# Altium PCB A车主控四层板V2.1.PcbDoc
Units mil, origin at the board's own origin, x right, y up, seen from the top; angles counter-clockwise.
Board outline 3937.01 x 2230.01 mil, 4 copper layers (Top Layer, GND, POWER, Bottom Layer); 112 components, 149 nets, 493 pads, 161 vias.
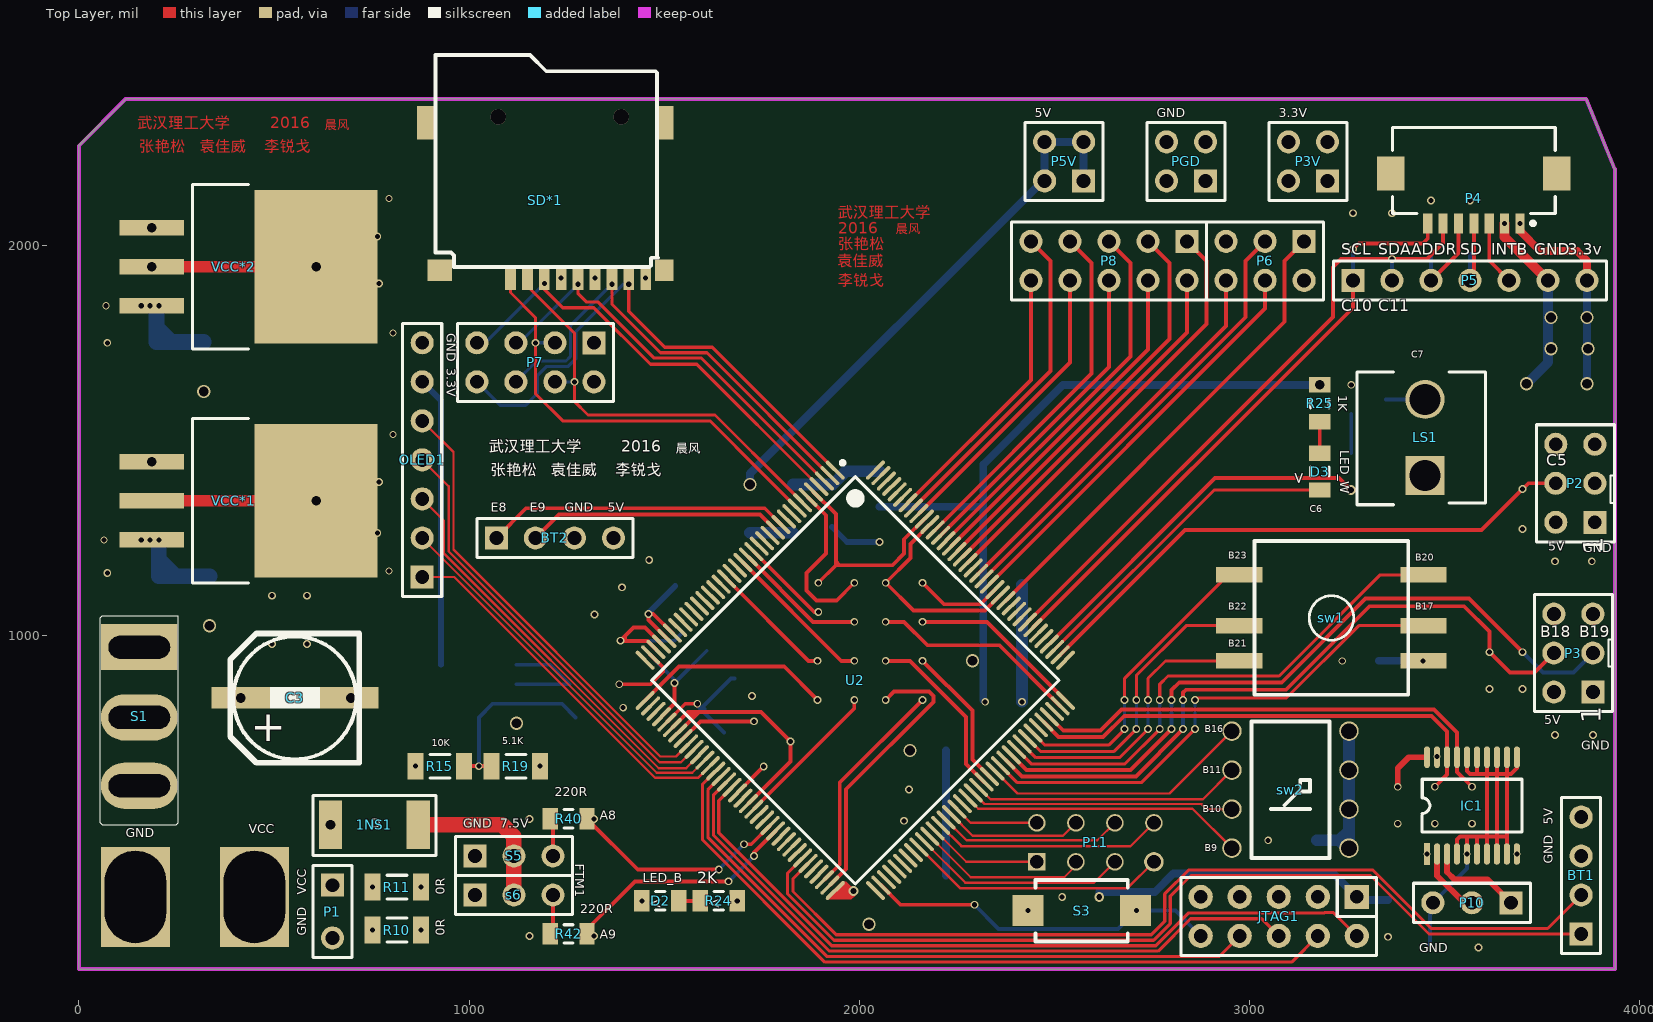
[diagram p0: Top Layer view]
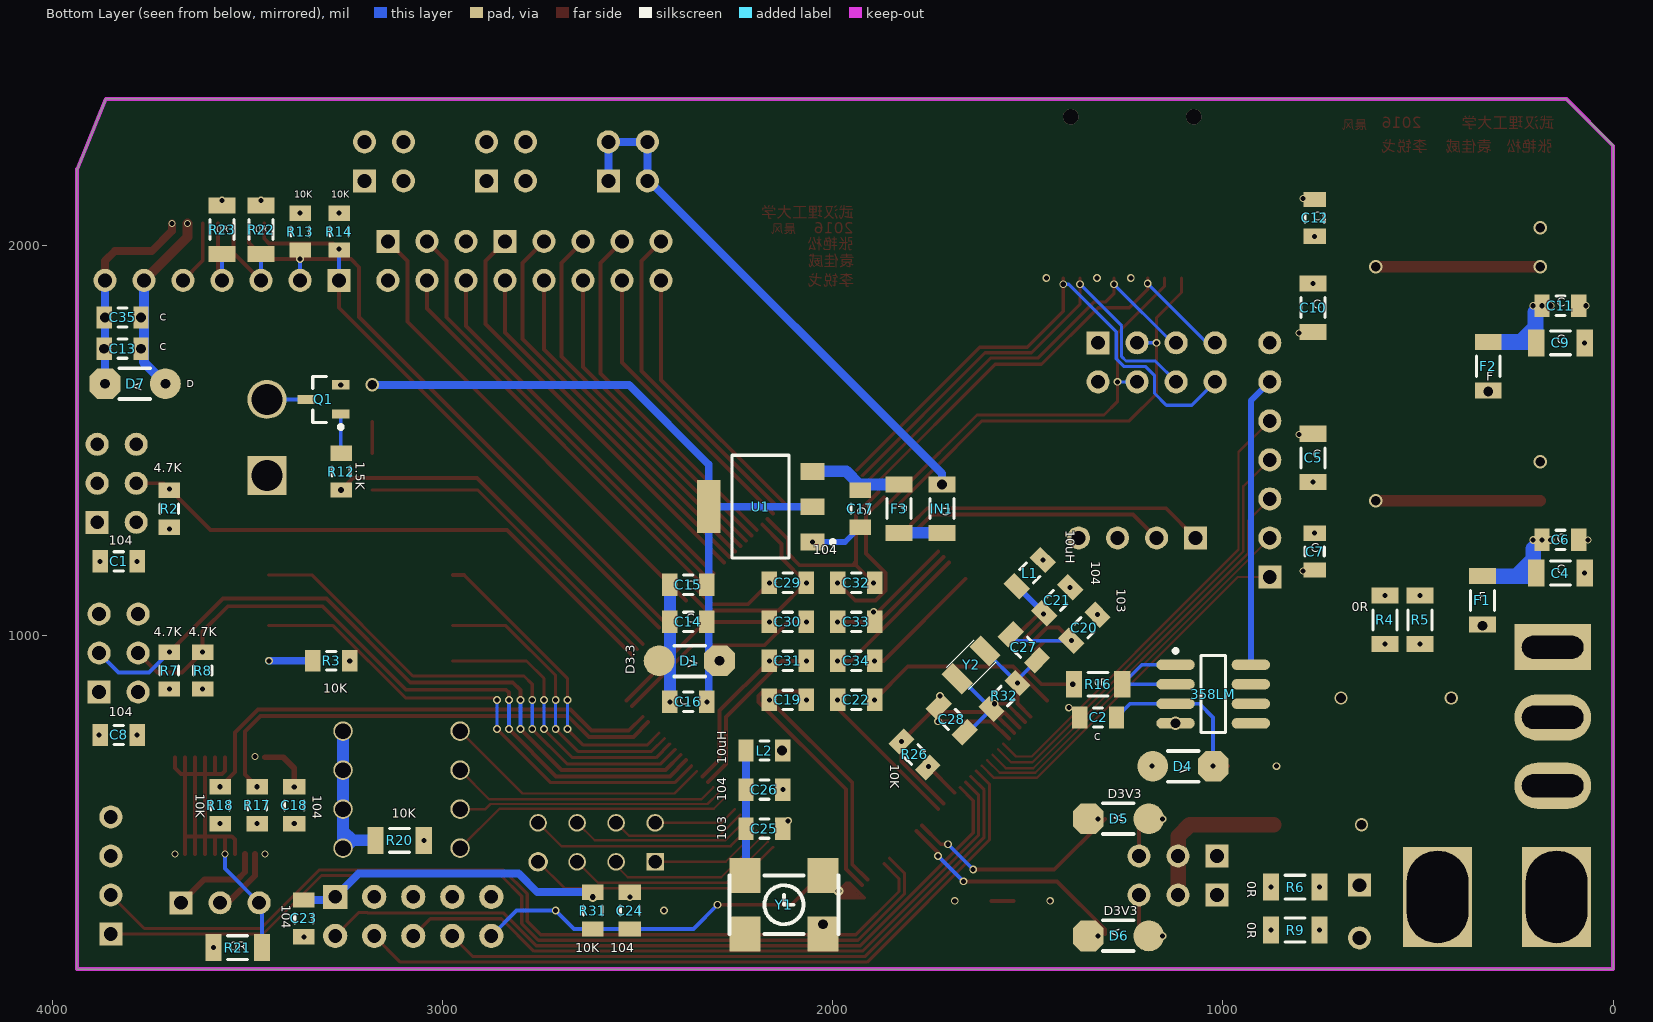
[diagram p1: Bottom Layer view, seen from below]
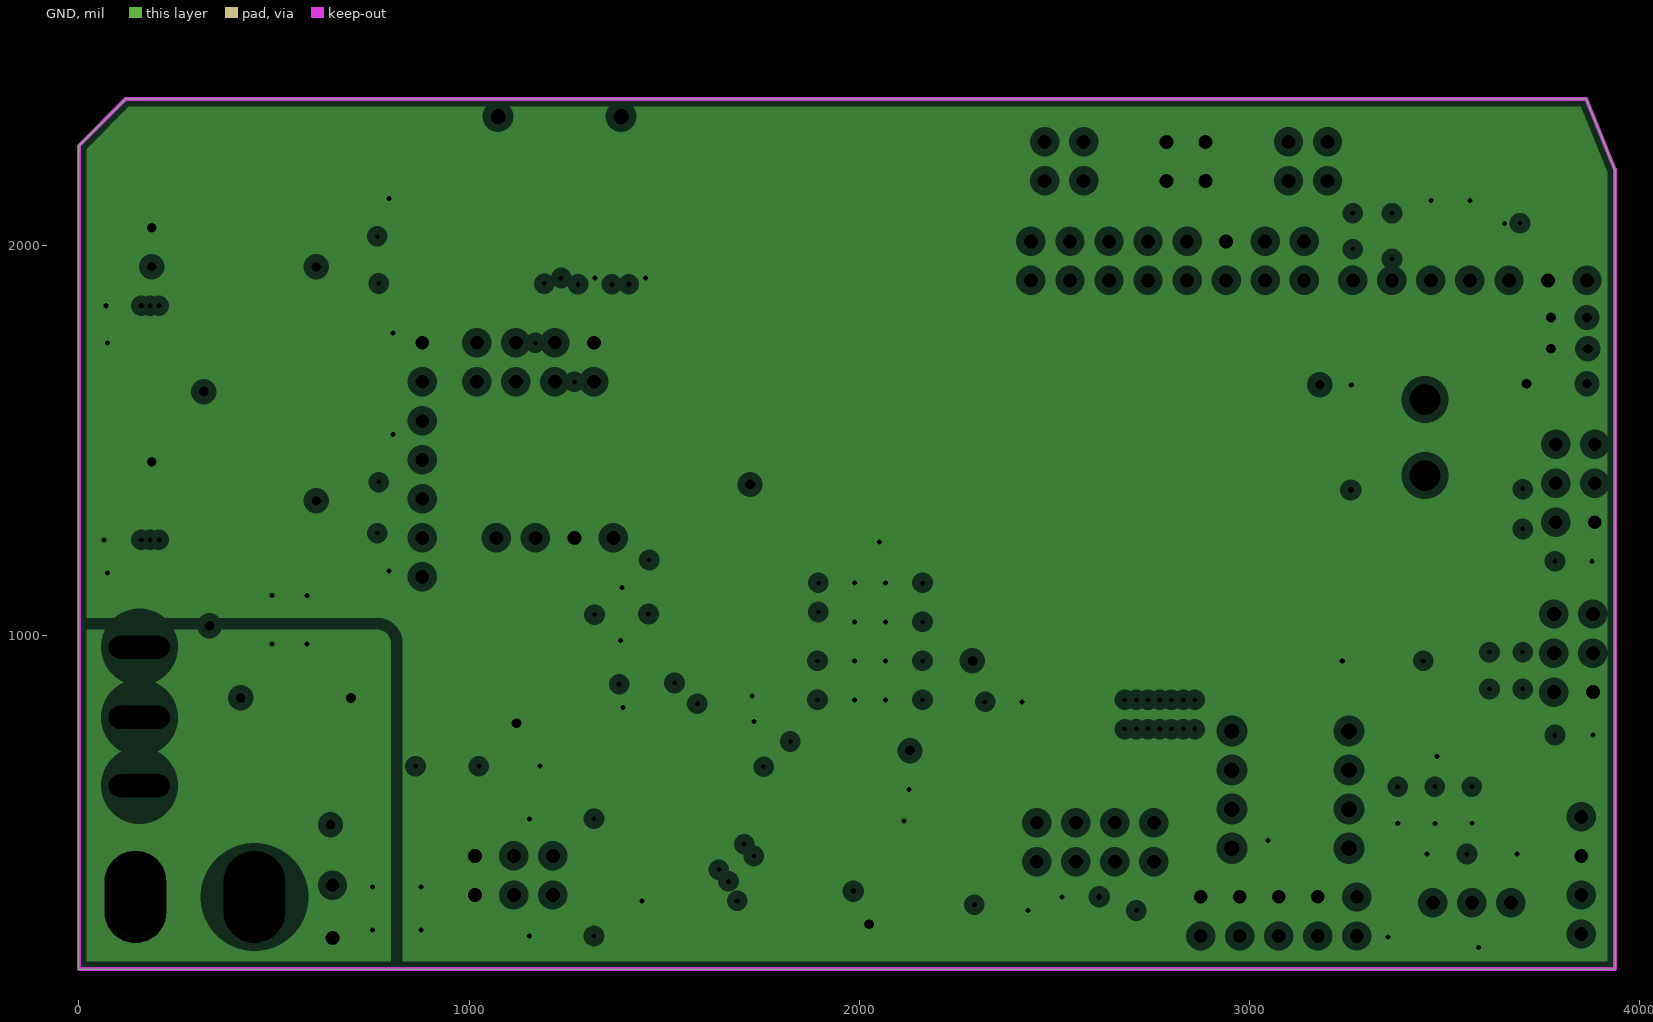
[diagram p2: GND, clearances drawn from the general rule]
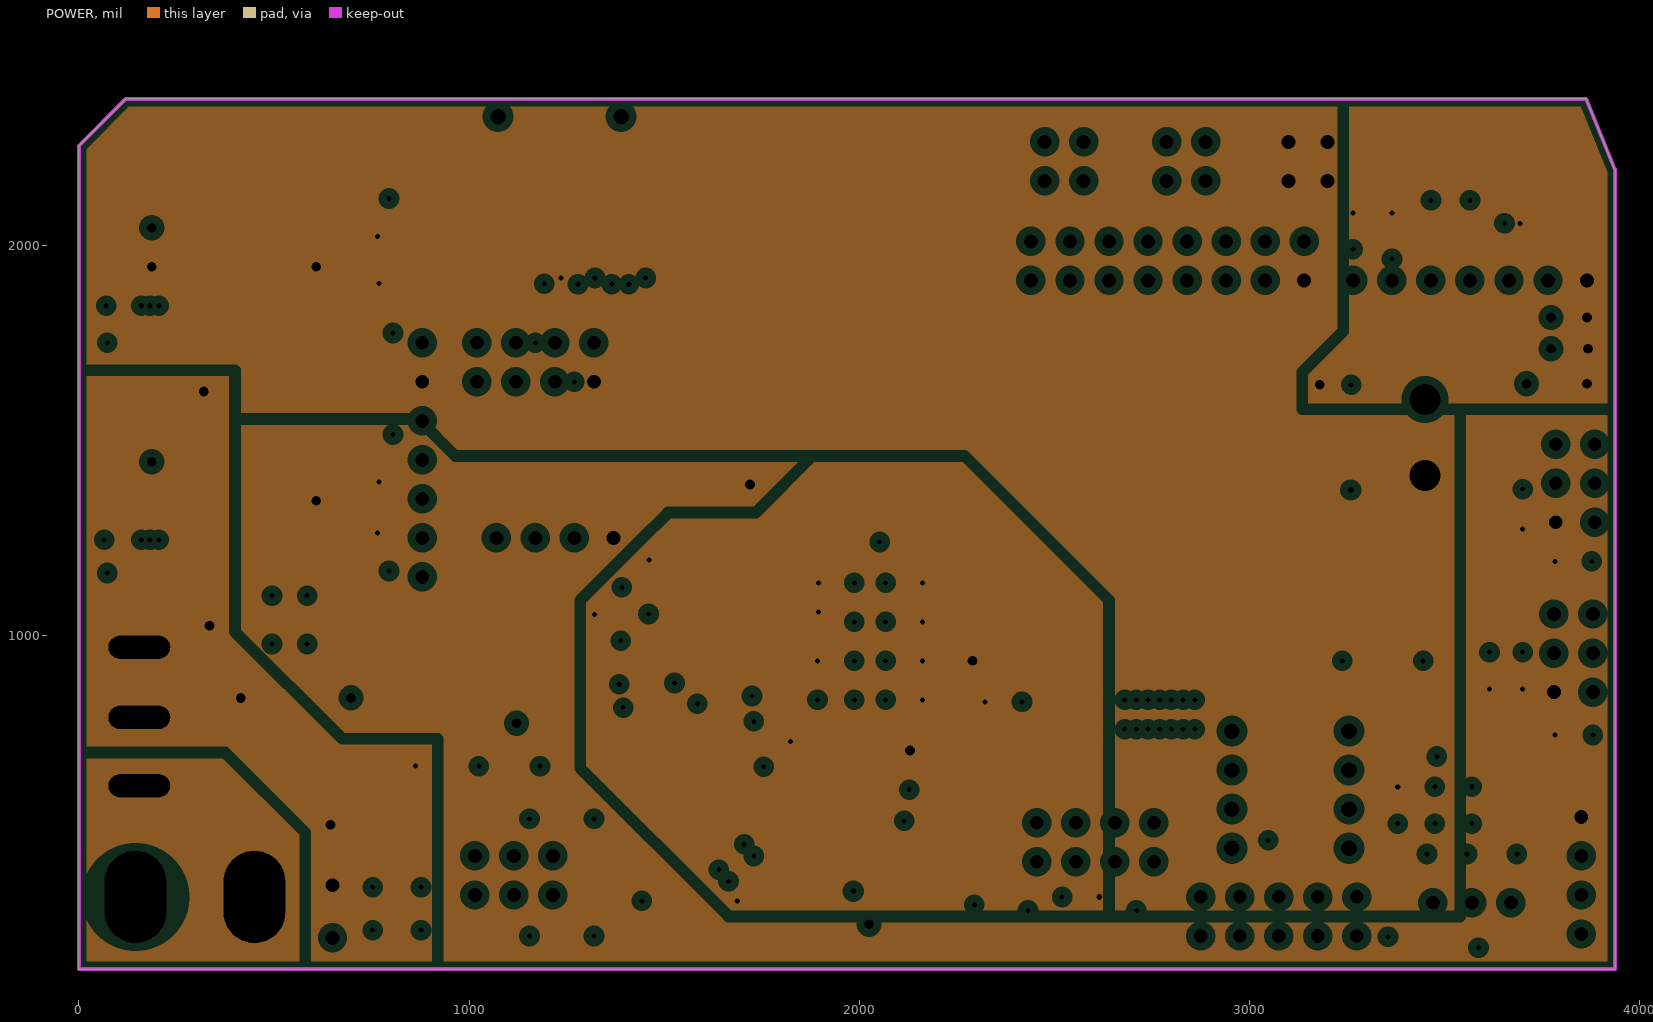
[diagram p3: POWER, clearances drawn from the general rule]

## Layer stack, top to bottom
Top Layer: signal copper 1.4
Dielectric: core 12.6, FR-4, Dk 4.8
GND: plane copper 1.4, net GND
Dielectric: prepreg 12.6, FR-4, Dk 4.8
POWER: plane copper 1.4, net VBAT
Dielectric: core 12.6, FR-4, Dk 4.8
Bottom Layer: signal copper 1.4

## Board outline
0,144.99 0,2255 120,2375 3862.58,2375 3936.07,2194.62 3937.01,2195 3937.01,145.01

## Design rules (kind name [scope] priority, off if disabled: settings)
Clearance [All] p1: gap=6
PlaneClearance [All] p1: clearance=20
PlaneConnect [All] p1: planeconnectstyle=Relief reliefexpansion=20 reliefentries=4 reliefconductorwidth=10 reliefairgap=10
PolygonConnect [All] p1: connectstyle=Relief reliefconductorwidth=10 reliefentries=4 polygonreliefangle="90 Angle" airgapwidth=10
RoutingVias [All] p1: holewidth=28 width=50 viastyle="Through Hole" minholewidth=28 minwidth=50 maxholewidth=28 maxwidth=50
SolderMaskExpansion [All] p1: expansion=4
Width [All] p1: maxlimit=50 minlimit=6 preferedwidth=10 minimp=50.000000 maximp=50.000000 favimp=50.000000
26 further rules are at their usual default settings.

## Components (designator, comment, footprint, x,y, rotation, side; value= is the part's Value field where it differs from the comment)
1NS1 "SK34" SK54 775,515 r0 top
358LM "LM358" SO8_M 1025,850 r180 bottom
BT1 "Header 4" HDR1X4 3850,235 r90 top
BT2 "Header 4" HDR1X4 1070,1249.98 r0 top
C1 "100nF" C2012 3830,1190 r180 bottom
C2 "Cap" C2012 1320,790 r180 bottom
C3 "Cap Pol1" SMD-EC-F8 415,840 r0 top
C4 "Cap Pol1" 1206(2) 135,1159.98 r180 bottom
C5 "Cap Pol1" 1206(2) 768.94,1454.98 r90 bottom
C6 "Cap" C2012 135,1244.98 r0 bottom
C7 "Cap" C2012 765,1214.98 r90 bottom
C8 "100nF" C2012 3830,744.98 r180 bottom
C9 "Cap Pol1" 1206(2) 135,1749.98 r180 bottom
C10 "Cap Pol1" 1206(2) 768.94,1839.98 r270 bottom
C11 "Cap" C2012 135,1844.98 r0 bottom
C12 "Cap" C2012 765,2069.98 r270 bottom
C13 "10uF" C2012 3820,1735 r0 bottom
C14 "10uF" C2012 2369.98,1035 r180 bottom
C15 "100nF" C2012 2369.98,1130 r180 bottom
C16 "2.2uF" C2012 2369.98,830 r180 bottom
C17 "100nF" R2012 1930,1324.98 r90 bottom
C18 "100nF" C2012 3380,565 r270 bottom
C19 "100nF" c2012 2115,835 r0 bottom
C20 "100nF" C2012 1355,1020 r135 bottom
C21 "10nF" C2012 1425,1090 r315 bottom
C22 "100nF" c2012 1940,835 r180 bottom
C23 "100nF" R2012 3355,274.98 r270 bottom
C24 "100nF" C2012 2520,294.98 r270 bottom
C25 "10nF" C2012 2175,504.98 r0 bottom
C26 "100nF" C2012 2175,604.98 r0 bottom
C27 "18pF" C2012 1510,970 r225 bottom
C28 "18pF" C2012 1695,785 r225 bottom
C29 "Cap" C2012 2115,1135 r0 bottom
C30 "Cap" C2012 2115,1034.98 r0 bottom
C31 "Cap" C2012 2115,934.98 r0 bottom
C32 "Cap" C2012 1940,1135 r180 bottom
C33 "Cap" C2012 1940,1035 r180 bottom
C34 "Cap" C2012 1940,935 r180 bottom
C35 "100nF" C2012 3820,1815 r0 bottom
D1 "1N4729A" "hole-chip diode" 2444.98,895 r180 bottom
D2 "POWER" R2012 1490,319.98 r180 top
D3 "POWER" R2012 3179.98,1420 r270 top
D4 "1N4729A" "hole-chip diode" 1180,625 r180 bottom
D5 "1N4729A" "hole-chip diode" 1190,569.98 r0 bottom
D6 "1N4729A" "hole-chip diode" 1190,269.98 r0 bottom
D7 "1N4729A" "hole-chip diode" 3710,1685 r0 bottom
F1 "1.5A" 1206(2) 335,1090 r90 bottom
F2 "500mA" 1206(2) 320,1689.98 r90 bottom
F3 "300mA" 1206(2) 1830,1324.98 r270 bottom
IC1 "74LVC245" "74LVC245 TSSOP" 3455,439.98 r90 top
IN1 "1SS355" 1206(2) 1720,1324.98 r270 bottom
JTAG1 "Header 5X2" IDC5X2 3075,280 r180 top
L1 "Inductor" C2012 1495,1160 r315 bottom
L2 "Inductor" C2012 2175,704.98 r0 bottom
LS1 "Buzzer" ABSM-1574 3440,1275 r90 top
OLED1 "Header 7" HDR1X7 880,1150 r90 top
P1 "Header 2" HDR1X2 650,360 r270 top
P2 "Header 3X2" HDR2X3 3885,1290 r90 top
P3 "Header 3X2" HDR2X3 3880,854.98 r90 top
P3V "Header 2X2" HDR2X2 3200,2164.98 r90 top
P4 "Header 7" FFC/SM1.0-2H7 3575,2120 r180 top
P5 "Header 7" HDR1X7 3265,1910 r0 top
P5V "Header 2X2" HDR2X2 2575,2164.98 r90 top
P6 "Header 3X2" HDR2X3 3140,2010 r180 top
P7 "Header 4X2" HDR2X4#1 1320,1750 r180 top
P8 "Header 5X2" HDR2X5 2840,2010 r180 top
P10 "Header 3" HDR1X3 3670,314.98 r180 top
P11 "Header 4X2" HDR2X4#2 2455,420 r0 top
PGD "Header 2X2" HDR2X2 2887.5,2164.98 r90 top
Q1 "QNPN" SOT95P240-3N 3305,1605 r0 bottom
R2 "Res2" R2012 3700,1325 r90 bottom
R3 "10k" R2012 3285,935 r0 bottom
R4 "Res2" 1206(2) 585,1040 r270 bottom
R5 "Res2" 1206(2) 495,1040 r270 bottom
R6 "Res2" 1206(2) 815,354.98 r180 bottom
R7 "Res2" R2012 3700,909.98 r90 bottom
R8 "Res2" R2012 3615,909.98 r270 bottom
R9 "Res2" 1206(2) 815,244.98 r180 bottom
R10 "Res2" 1206(2) 815,244.98 r180 top
R11 "Res2" 1206(2) 815,354.98 r180 top
R12 "Res2" R2012 3260,1420 r270 bottom
R13 "Res2" R2012 3365,2035 r90 bottom
R14 "Res2" R2012 3265,2035 r90 bottom
R15 "Res2" 1206(2) 925,665 r180 top
R16 "Res2" 1206(2) 1320,875 r180 bottom
R17 "Res2" R2012 3475,565 r270 bottom
R18 "Res2" R2012 3570,565 r270 bottom
R19 "Res2" 1206(2) 1120,665 r180 top
R20 "Res2" 1206(2) 3110,475 r0 bottom
R21 "Res2" 1206(2) 3525,200.02 r180 bottom
R22 "Res2" 1206(2) 3465,2040 r90 bottom
R23 "Res2" 1206(2) 3565,2040 r90 bottom
R24 "1K" R2012 1640,319.98 r0 top
R25 "1K" R2012 3180,1595 r90 top
R26 "10K" R2012 1790,695 r225 bottom
R31 "10K" R2012 2615,294.98 r90 bottom
R32 "1M" R2012 1560,844.98 r315 bottom
R40 "220R" R2012 1255,529.98 r0 top
R42 "220R" R2012 1255,235 r0 top
S1 "SW-SPST" SW-125V6A(-) 155,970 r270 top
S3 "SW-PB" SMT_Button 2570,294.98 r0 top
S5 "Header 3" HDR1X3 1015,434.98 r0 top
s6 "Header 3" HDR1X3 1015,334.98 r0 top
SD*1 "TF_card" SD_card 1270,2260 r270 top
sw1 "SW-5" SW-5 3210,1045 r0 top
sw2 "switch-4to4" switch_4to4 2955,455 r0 top
U1 "REG1117" SOT223 2185,1329.98 r90 bottom
U2 "K60P144" LQFP144 1990,885 r315 top
VCC*1 "LM1084" "DPAK LM2940" 435,1344.98 r0 top
VCC*2 "LM1086" "DPAK LM2940" 435,1944.98 r0 top
Y1 "50MHZ" 贴片有源晶体 2225,235 r180 bottom
Y2 "32.768K" CT3215 1610,960 r315 bottom

## Footprints (in the part's own frame and the unit in brackets; to place one, negate y for a bottom-side part, rotate by r counter-clockwise, add the part's x,y. Pads: shape width x height; smd on the part's side, far side on the other; paste and mask are expansions set on the pad)
"74LVC245 TSSOP" [mm]
  rect 1.4x0.4 smd: 1(0,0)
  oval 1.4x0.4 smd: 2(0,-0.65) 3(0,-1.3) 4(0,-1.95) 5(0,-2.6) 6(0,-3.25) 7(0,-3.9) 8(0,-4.55) 9(0,-5.2) 10(0,-5.85) 11(6.3,-5.85) 12(6.3,-5.2) 13(6.3,-4.55) 14(6.3,-3.9) 15(6.3,-3.25) 16(6.3,-2.6) 17(6.3,-1.95) 18(6.3,-1.3) 19(6.3,-0.65) 20(6.3,0)
  silkscreen extent 1.43,-6.18 4.87,0.33
1206(2) [mm]
  rect 1.05x1.75 smd: 1(-1.575,0) 2(1.575,0)
  silkscreen extent -0.65,-0.77 0.65,0.77, body extent -1.6,-0.8 1.6,0.8, height 1.6
ABSM-1574 [mil] "Magnetic Transducer Buzzer"
  rect 100x100 hole 80: 1A(135,-10)
  round 100 hole 80: 2A(330,-10)
  silkscreen extent 60,-165 400,165
C2012 [mm] "Chip Capacitor, 2-Leads, Body 2.0x1.2mm, IPC Low Density"
  rect 1x1.45 smd: 1(-1.2,0) 2(1.2,0)
  silkscreen extent -0.3,-0.63 0.3,0.63, body extent -0.98,-0.6 1.02,0.6, height 0.5
c2012 [mm] "Chip Capacitor, 2-Leads, Body 2.0x1.2mm, IPC Low Density"
  rect 1x1.45 smd: 1(-1.2,0) 2(1.2,0)
  silkscreen extent -0.3,-0.63 0.3,0.63, body extent -0.98,-0.6 1.02,0.6, height 0.5
CT3215 [mm]
  rect 1.05x1.85 smd: 1(0,0) 2(2.54,0)
  silkscreen extent 0,-1.02 2.54,1.02
"DPAK LM2940" [mm] "D2-PAK, 4-Pads, Body 7.93x8.69mm (max), IPC Medium Density"
  rect 4.2x1 smd: 1(-6.3,2.54) 2(-6.3,0) 3(-6.3,-2.54)
  rect 8x10 smd: 4(4.4,0)
  silkscreen extent -3.65,-5.35 0,5.35, body extent -3.65,-5.33 6,5.33, height 4.83
FFC/SM1.0-2H7 [mm] "Connector; FH12 Series; 7 Position; 1.0mm Spaced Bottom Standard Contact"
  rect 0.6x1.3 smd: 1(-3,1.625) 2(-2,1.625) 3(-1,1.625) 4(0,1.625) 5(1,1.625) 6(2,1.625) 7(3,1.625)
  rect 1.8x2.2 smd: 8(5.4,-1.625) 9(-5.4,-1.625)
  silkscreen extent -5.3,-4.62 5.3,1.75, body extent -5.3,-4.62 5.3,0.97, height 2
HDR1X2 [mm] "Connector; Header; 2 Position"
  rect 1.5x1.5 hole 0.9: 1(0,0)
  round 1.5 hole 0.9: 2(3.429,0)
  silkscreen extent -1.27,-1.27 4.7,1.27
HDR1X3 [mm] "Connector; Header; 3 Position"
  rect 1.5x1.5 hole 0.9: 1(0,0)
  round 1.5 hole 0.9: 2(2.54,0) 3(5.08,0)
  silkscreen extent -1.27,-1.27 6.35,1.27
HDR1X4 [mm] "Connector; Header; 4 Position"
  rect 1.5x1.5 hole 0.9: 1(0,0)
  round 1.5 hole 0.9: 2(2.54,0) 3(5.08,0) 4(7.62,0)
  silkscreen extent -1.27,-1.27 8.89,1.27
HDR1X7 [mm] "Connector; Header; 7 Position"
  rect 1.5x1.5 hole 0.9: 1(0,0)
  round 1.5 hole 0.9: 2(2.54,0) 3(5.08,0) 4(7.62,0) 5(10.16,0) 6(12.7,0) 7(15.24,0)
  silkscreen extent -1.27,-1.27 16.51,1.27
HDR2X2 [mm] "Connector; Header; 2x2 Position"
  rect 1.5x1.5 hole 0.9: 1(0,0)
  round 1.5 hole 0.9: 2(0,2.54) 3(2.54,0) 4(2.54,2.54)
  silkscreen extent -1.27,-1.27 3.81,3.81
HDR2X3 [mm] "Connector; Header; 3x2 Position"
  rect 1.5x1.5 hole 0.9: 1(0,0)
  round 1.5 hole 0.9: 2(0,2.54) 3(2.54,0) 4(2.54,2.54) 5(5.08,0) 6(5.08,2.54)
  silkscreen extent -1.27,-1.27 6.35,3.81
HDR2X4#1 [mm] "Connector; Header; 4x2 Position"
  rect 1.5x1.5 hole 0.9: 1(0,0)
  round 1.5 hole 0.9: 2(0,2.54) 3(2.54,0) 4(2.54,2.54) 5(5.08,0) 6(5.08,2.54) 7(7.62,0) 8(7.62,2.54)
  silkscreen extent -1.27,-1.27 8.89,3.81, body extent -1.27,-1.27 8.89,3.81, height 7.58
HDR2X4#2 [mm] "Connector; Header; 4x2 Position"
  rect 1.143x1.143 hole 0.9: 1(0,0)
  round 1.143 hole 0.9: 2(0,2.54) 3(2.54,0) 4(2.54,2.54) 5(5.08,0) 6(5.08,2.54) 8(7.62,2.54)
  round 1.27 hole 0.9: 7(7.62,0)
  body extent -1.27,-1.27 8.89,3.81, height 7.58
HDR2X5 [mm] "Connector; Header; 5x2 Position"
  rect 1.5x1.5 hole 0.9: 1(0,0)
  round 1.5 hole 0.9: 2(0,2.54) 3(2.54,0) 4(2.54,2.54) 5(5.08,0) 6(5.08,2.54) 7(7.62,0) 8(7.62,2.54) 9(10.16,0) 10(10.16,2.54)
  silkscreen extent -1.27,-1.27 11.43,3.81
"hole-chip diode" [mm]
  round 2 smd: 1(0,1.016)
  oct 2x2 smd: 2(3.937,1.016)
  silkscreen extent 1,0 3,2
IDC5X2 [mil]
  rect 62x62 hole 35: 1(-200,-50)
  round 62 hole 35: 2(-200,50) 3(-100,-50) 4(-100,50) 5(0,-50) 6(0,50) 7(100,-50) 8(100,50) 9(200,-50) 10(200,50)
  silkscreen extent -250,-100 250,100
LQFP144 [mm]
  oval 1.65x0.25 smd: 1(-10.6,8.75) 2(-10.6,8.25) 3(-10.6,7.75) 4(-10.6,7.25) 5(-10.6,6.75) 6(-10.6,6.25) 7(-10.6,5.75) 8(-10.6,5.25) 9(-10.6,4.75) 10(-10.6,4.25) 11(-10.6,3.75) 12(-10.6,3.25) 13(-10.6,2.75) 14(-10.6,2.25) 15(-10.6,1.75) 16(-10.6,1.25) 17(-10.6,0.75) 18(-10.6,0.25) 19(-10.6,-0.25) 20(-10.6,-0.75) 21(-10.6,-1.25) 22(-10.6,-1.75) 23(-10.6,-2.25) 24(-10.6,-2.75) 25(-10.6,-3.25) 26(-10.6,-3.75) 27(-10.6,-4.25) 28(-10.6,-4.75) 29(-10.6,-5.25) 30(-10.6,-5.75) 31(-10.6,-6.25) 32(-10.6,-6.75) 33(-10.6,-7.25) 34(-10.6,-7.75) 35(-10.6,-8.25) 36(-10.6,-8.75) 73(10.6,-8.75) 74(10.6,-8.25) 75(10.6,-7.75) 76(10.6,-7.25) 77(10.6,-6.75) 78(10.6,-6.25) 79(10.6,-5.75) 80(10.6,-5.25) 81(10.6,-4.75) 82(10.6,-4.25) 83(10.6,-3.75) 84(10.6,-3.25) 85(10.6,-2.75) 86(10.6,-2.25) 87(10.6,-1.75) 88(10.6,-1.25) 89(10.6,-0.75) 90(10.6,-0.25) 91(10.6,0.25) 92(10.6,0.75) 93(10.6,1.25) 94(10.6,1.75) 95(10.6,2.25) 96(10.6,2.75) 97(10.6,3.25) 98(10.6,3.75) 99(10.6,4.25) 100(10.6,4.75) 101(10.6,5.25) 102(10.6,5.75) 103(10.6,6.25) 104(10.6,6.75) 105(10.6,7.25) 106(10.6,7.75) 107(10.6,8.25) 108(10.6,8.75)
  oval 0.25x1.65 smd: 37(-8.75,-10.6) 38(-8.25,-10.6) 39(-7.75,-10.6) 40(-7.25,-10.6) 41(-6.75,-10.6) 42(-6.25,-10.6) 43(-5.75,-10.6) 44(-5.25,-10.6) 45(-4.75,-10.6) 46(-4.25,-10.6) 47(-3.75,-10.6) 48(-3.25,-10.6) 49(-2.75,-10.6) 50(-2.25,-10.6) 51(-1.75,-10.6) 52(-1.25,-10.6) 53(-0.75,-10.6) 54(-0.25,-10.6) 55(0.25,-10.6) 56(0.75,-10.6) 57(1.25,-10.6) 58(1.75,-10.6) 59(2.25,-10.6) 60(2.75,-10.6) 61(3.25,-10.6) 62(3.75,-10.6) 63(4.25,-10.6) 64(4.75,-10.6) 65(5.25,-10.6) 66(5.75,-10.6) 67(6.25,-10.6) 68(6.75,-10.6) 69(7.25,-10.6) 70(7.75,-10.6) 71(8.25,-10.6) 72(8.75,-10.6) 109(8.75,10.6) 110(8.25,10.6) 111(7.75,10.6) 112(7.25,10.6) 113(6.75,10.6) 114(6.25,10.6) 115(5.75,10.6) 116(5.25,10.6) 117(4.75,10.6) 118(4.25,10.6) 119(3.75,10.6) 120(3.25,10.6) 121(2.75,10.6) 122(2.25,10.6) 123(1.75,10.6) 124(1.25,10.6) 125(0.75,10.6) 126(0.25,10.6) 127(-0.25,10.6) 128(-0.75,10.6) 129(-1.25,10.6) 130(-1.75,10.6) 131(-2.25,10.6) 132(-2.75,10.6) 133(-3.25,10.6) 134(-3.75,10.6) 135(-4.25,10.6) 136(-4.75,10.6) 137(-5.25,10.6) 138(-5.75,10.6) 139(-6.25,10.6) 140(-6.75,10.6) 141(-7.25,10.6) 142(-7.75,10.6) 143(-8.25,10.6) 144(-8.75,10.6)
  silkscreen extent -10.72,-9.37 9.37,9.55, body extent -10,-10 10,10, height 1.6
R2012 [mm] "Chip Resistor, 2-Leads, Body 2.0x1.2mm, IPC Low Density"
  rect 1x1.4 smd: 1(-1.2,0) 2(1.2,0)
  silkscreen extent -0.3,-0.6 0.3,0.6, body extent -0.98,-0.6 1.02,0.6, height 0.5
SD_card [mm]
  rect 1.6x0.7 smd: 1(8.732,-4.16) 2(8.732,-3.06) 3(8.732,-1.96) 4(8.732,-0.86) 5(8.732,0.24) 6(8.732,1.34) 7(8.732,2.44) 8(8.732,3.54) 9(8.732,4.64)
  rect 1.4x1.2 smd: 10(8.232,5.84)
  rect 2.2x1.2 smd: 11(-1.368,5.84) 12(-1.368,-9.66)
  rect 1.4x1.6 smd: 13(8.232,-8.76)
  silkscreen extent -5.79,-9.04 8.03,5.43
SK54 [mm]
  rect 1.52x3.18 smd: A(-3.305,0) K(2.413,0)
  silkscreen extent -4.44,-2 3.56,1.9
SMD-EC-F8 [mm]
  rect 3.8x1.4 smd: 1(0,0) 2(7.051,0)
  silkscreen extent -0.69,-4.22 7.71,4.2
SMT_Button [mil]
  rect 80x80 smd: 1(-137.8,0) 2(137.8,0)
  silkscreen extent -118,-79 118,79
SO8_M [mm] "SOIC, 8-Leads, Body 4.9x3.9mm, Pitch 1.27mm, IPC Low Density"
  oval 2.5x0.7 smd: 1(-2.45,1.905) 2(-2.45,0.635) 3(-2.45,-0.635) 4(-2.45,-1.905) 5(2.45,-1.905) 6(2.45,-0.635) 7(2.45,0.635) 8(2.45,1.905)
  silkscreen extent -2.58,-2.5 0.8,2.93, body extent -2,-2.5 2,2.5, height 1.75
SOT95P240-3N [mm] "SOT23, 3-Leads, Body 2.9x1.3mm, Pitch 0.95mm, Lead Span 2.4mm, IPC Medium Density"
  rect 1.15x0.6 smd: 1(-1.125,0.95) 2(-1.125,-0.95) 3(1.125,0)
  silkscreen extent -1.25,-1.5 0.7,1.92, body extent -0.7,-1.5 0.7,1.5, height 1.14
SOT223 [mm] "SOT-223/SC-73; 4 Leads; Body 6.7 x 7.3 mm, inc. leads (LxW max)"
  rect 1.1x1.55 smd: 1(-2.3,-3.375) 2(0,-3.375) 3(2.3,-3.375)
  rect 3.45x1.55 smd: 4(0,3.375)
  silkscreen extent -3.35,-4.82 3.35,1.85, body extent -3.25,-3.47 3.25,3.49, height 1.66
SW-5 [mm]
  rect 3x1 smd: 1(-6,2.8) 2(-6,-0.5) 3(-6,-2.8) 4(6,-2.8) 5(6,-0.5) 6(6,2.8)
  silkscreen extent -5,-5 5,5
SW-125V6A(-) [mm]
  rect 3x5 hole 1.5 slot 4 at 90 deg: 0(0,0)
  oval 3x5 hole 1.5 slot 4 at 90 deg: 1(4.572,0) 2(9.017,0)
  silkscreen extent -2.03,-2.54 11.56,2.54
switch_4to4 [mil]
  round 50 hole 40: 1(0,300) 2(0,200) 3(0,100) 4(0,0) 5(300,0) 6(300,100) 7(300,200) 8(300,300)
  silkscreen extent 50,-25 250,325
贴片有源晶体 [mil]
  rect 80x90 smd: 1(0,0) 2(200,0) 3(200,150) 4(0,150)
  silkscreen extent -40,0 240,150, body extent -37,-23 238,173, height 74

## Part data
1NS1 D1 D4 D5 D6 D7 IN1: library part "Diode 1N4148", "High Conductance Fast Diode"
BT1 BT2: "Header, 4-Pin"
C1 C8 C13 C14 C15 C16 C17 C18 C19 C20 C21 C22 C23 C24 C25 C26 C35: library part Cap, "Capacitor"
C2 C6 C7 C11 C12 C29 C30 C31 C32 C33 C34: "贴片电容"
C3 C4 C5 C9 C10: "Polarized Capacitor (Radial)"
C27 C28: library part 陶瓷电容, "CAP"
D2 D3: library part LED, "Typical INFRARED GaAs LED"
F1 F2 F3: library part "Fuse 1", "Fuse"
JTAG1 P8: "Header, 5-Pin, Dual row"
LS1: "Magnetic Transducer Buzzer"
OLED1 P4 P5: "Header, 7-Pin"
P1: "Header, 2-Pin"
P2 P3 P6: "Header, 3-Pin, Dual row"
P3V P5V PGD: "Header, 2-Pin, Dual row"
P7 P11: "Header, 4-Pin, Dual row"
P10 S5 s6: "Header, 3-Pin"
Q1: "NPN Bipolar Transistor"
R2 R4 R5 R6 R7 R8 R9 R10 R11 R12 R13 R14 R15 R16 R17 R18 R19 R20 R21 R22 R23: "Resistor"
R3: library part Res, "Resistor of led"
R24 R25 R26 R31 R32 R40 R42: library part Res, "Resistor"
S1: "Single-Pole, Single-Throw Switch"
S3: "Switch"
U1: "800mA and 1A Low Dropout Positive Regulator 2.85V, 3.3V, 5V, and Adjustable"
VCC*1: library part LM1086
Y1: library part XTAL1
Y2: library part XTAL, "Crystal Oscillator"

## Free pads (board coordinates)
  rect 177.17x255.91 hole 157.48 slot 236.22 at 90 deg: 0(145,330) 0(450,330)

## Via types
v1: diameter 20, hole 13, Top Layer to Bottom Layer, 121 vias
v2: diameter 34, hole 25, Top Layer to Bottom Layer, 22 vias
v3: diameter 18, hole 13, Top Layer to Bottom Layer, 13 vias
v4: diameter 25, hole 15, Top Layer to Bottom Layer, 3 vias
v5: diameter 39.37, hole 39.37, Top Layer to Bottom Layer, 2 vias

## Nets (pads, with @x,y where several pads share a name; then routed paths per layer and width w, separated by ;. In a path a pad name is that pad's centre, name@x,y a point inside that pad or via, vN(x,y) a via of type N, cw(c..) or ccw(c..) an arc to the next point about the centre after c; other vN are vias at no path point)
3.3V: 358LM.8 C10.1 C12.2 C18.1 IC1.20 LS1.1A OLED1.6 P3V.1 P3V.2 P3V.3 P3V.4 P6.2 P7.2 SD*1.4 VCC*2.2 VCC*2.4 | length 1300.7
  Top Layer w15: v1(3380,612.23) 3380,660 3408.01,688.01 IC1.20
  Top Layer w30: v2(186.97,1944.98) v2(608.23,1944.98)
  Bottom Layer w15: OLED1.6 928.54,1601.46 358LM.8
  other v1: 768.94,1901.99 1236.13,1916.24 765,2022.74
5V: BT1.4 BT2.4 C1.2 C5.1 C7.2 C8.2 IN1.1 P2.2 P3.2 P5V.1 P5V.2 P5V.3 P5V.4 R2.1 R7.1 R8.2 VCC*1.2 VCC*1.4 | length 1912
  Top Layer w30: VCC*1.2 v2(608.23,1344.98)
  Bottom Layer w20: v2(1720,1386.99) 1720,1415 2475,2170 P5V.4 ; P5V.2 P5V.4 ; P5V.1 P5V.3 P5V.4
  other v1: 3782.76,744.98 3615,862.74 3700,862.74 3782.76,1190 765,1262.23 3700,1272.74 768.94,1392.97
"ADC0 SE16": U2.36
"ADC1 SE16": R16.1 U2.35 | length 182.3
  Top Layer w10: v1(1385,875) 1465,875 1497.6,907.6 1497.6,918.06 U2.35
"BT RXD": BT1.1 U2.66 | length 2363.3
  Top Layer w8: U2.66 1816,390.85 1816,338.2 1935.2,219 2754.4,219 2797,261.6 2797,332 2850,385 3310,385 3460,235 BT1.1
"BT TXD": BT1.2 U2.67 | length 2361.8
  Top Layer w8: U2.67 1830,377.01 1830,343.99 1940.99,233 2748.6,233 2783,267.4 2783,337.8 2844.2,399 3315.8,399 3465.8,249 3764,249 BT1.2
CE: P7.3 SD*1.1 U2.8 | length 1165.4
  Top Layer w8: SD*1.1 1106.2,1878.8 1170,1815 v1(1170,1750) 1170,1620 1240,1550 1617.31,1550 1747.31,1420 U2.8
  Bottom Layer w8: v1(1170,1750) P7.3
CLK: P4.7 P5.1 R14.1 U2.115 | length 1549.5
  Top Layer w10: U2.115 3265,1839.85 P5.1 ; v1(3265,1990) 3280,2005 3445,2005 3456.89,2016.89 P4.7
  Bottom Layer w10: P5.1 R14.1
DAC0: U2.38
DAC1: U2.39
EGND: C3.2 P1.2 pad.0@145,330 R4.2 R5.2 R6.2 R9.2 R10.2 R11.2
  other v1: 752.99,244.98 752.99,354.98 495,977.99 585,977.99
  other v2: 697.5,840
EZP_CS: R26.2 U2.54 | length 94.8
  Top Layer w10: U2.54 v1(1755,663.92)
GND: 358LM.4 BT1.3 BT2.3 C1.1 C2.1 C4.2 C5.2 C6.1 C7.1 C8.1 C9.2 C10.2 C11.1 C12.1 C13.1 C14.1 C15.1 C16.1 C17.1 C18.2 C19.1 C20.1 C21.1 C22.1 C23.2 C24.1 C25.1 C26.1 C27.1 C28.1 C29.1 C30.1 C31.1 C32.1 C33.1 C34.1 C35.1 D1.1 D2.2 D4.1 D5.1 D6.1 D7.1 IC1.1 IC1.10 IC1.19 JTAG1.3 JTAG1.5 JTAG1.7 JTAG1.9 OLED1.7 P2.1 P3.1 P4.2 P5.6 P6.5 P7.1 PGD.1 PGD.2 PGD.3 PGD.4 Q1.2 R3.1 R4.1 R5.1 R6.1 R9.1 R10.1 R11.1 R17.2 R18.2 R19.1 R20.1 R21.1 R22.2 R23.2 S3.1 S5.1 s6.1 SD*1.6 SD*1.9 U1.1 U2.6 U2.17 U2.18 U2.33 U2.34 U2.44 U2.57 U2.71 U2.93 U2.107 U2.121 U2.134 VCC*1.1 VCC*2.1 Y1.2 | length 5322.7
  Top Layer w10: 1400,990.83 1400,998.19 ; U2.34 1457.67,985.83 1389.17,985.83 v1(1388.41,986.59) 1400,998.19 ; U2.33 1451.34,1020 1421.81,1020 1400,998.19 ; U2.44 1592.69,780 v1(1730,780) ; U2.18 1953.92,935 v1(1987.24,935) ; U2.17 1881.76,1035 v1(1987.24,1035) ; U2.57 1987.24,812.65 v1(1987.24,835) ; U2.6 1915,1307.99 1915,1210 1865,1160 1865,1115 1890,1090 1942.24,1090 v1(1987.24,1135) ; U2.71 1966,401.66 1966,606 2190,830 2190,845 2179,856 2088.76,856 v1(2067.76,835) ; v1(2067.76,934.98) 2130.02,934.98 2274,791 2274,670.6 U2.93 ; v1(2067.76,1034.98) 2115.02,1034.98 2175,975 2359.34,975 U2.107 ; U2.134 2131,1234.79 2131,1198.24 v1(2067.76,1135) 2138.76,1064 2322.11,1064 U2.121
  Top Layer w25: v3(3653.74,2056.02) 3653.74,2021.26 P5.6
  Bottom Layer w10: v1(1388.41,986.59) 1526.59,986.59 C27.1
  Bottom Layer w15: C17.1 1968.31,1239.43 v1(2052.13,1239.43)
  Bottom Layer w25: v2(3710,1645) 3765,1700 P5.6
  Bottom Layer w30: v1(2417.23,830) C14.1 C15.1
  other v1: 3587.01,200.02 3355,227.74 1155,230 877.01,244.98 2432.2,294.98 1442.76,319.98 2520,330 877.01,354.98 3047.99,475 3380,517.76 3475,517.76 3570,517.76 2115,525 1155,530 2127.76,604.98 1182.01,665 3880,745 1395,815 1725,845 495,1102.01 585,1102.01 1391.59,1123.41 72.99,1159.98 3877.24,1190 3260.71,1642.4 72.99,1749.98 1322.74,1916.24 1452.66,1916.24 3465,2115 3565,2115
  other v2: 2025,260 1121.46,775 186.97,1444.98 3772.76,1735 3772.76,1815 186.97,2044.98
  other v3: 3455,439.98 3685.32,439.98 3480,690 3237.76,935 795,1165 65,1245 805,1515 805,1775 70,1845 795,2120
IRQ: P7.8 SD*1.8 U2.1 | length 1393.5
  Top Layer w8: SD*1.8 v1(1409.35,1900) 1409.35,1830.65 1501.33,1738.67 1623.51,1738.67 1623.59,1738.59 U2.1
  Bottom Layer w8: P7.8 1080,1590 1145,1590 1175,1620 1175,1665.65 1198.88,1689.53 1254.33,1689.53 1273.53,1708.73 1273.53,1778.53 1395,1900 v1(1409.35,1900)
K3.3V: C13.2 C14.2 C15.2 C16.2 C19.2 C20.2 C23.1 C29.2 C30.2 C31.2 C32.2 C33.2 C34.2 C35.2 D1.2 D7.2 JTAG1.1 L1.1 L2.1 P4.1 P5.7 R13.2 R14.2 R24.2 R25.2 R26.1 R31.2 U1.2 U1.4 U2.5 U2.16 U2.21 U2.42 U2.43 U2.56 U2.70 U2.94 U2.108 U2.122 U2.135 | length 6536.5
  Top Layer w10: U2.42 1561,803.98 ; U2.43 1574.85,790 ; 1574.85,803.83 1574.85,790.12 ; U2.21 1870.4,935 v1(1892.76,935) ; U2.56 1823.41,676.65 v1(1823.41,728.41) 1747.83,803.98 1588.83,803.98 ; U2.16 1884.6,1060 v1(1895,1060) ; U2.5 1940,1310.82 1940,1190 ; v1(1895,1135) 1940,1180 ; U2.70 1950,413.5 1950,622.76 v1(2162.24,835) ; v1(2162.24,934.98) 2290,807.23 2290,682.44 U2.94 ; v1(2162.24,1034.98) 2327.2,1034.98 U2.108 ; v1(2162.24,1135) 2217.24,1080 2310.27,1080 U2.122 ; U2.135 2115,1246.63 2115,1210 2085,1180 1950,1180 ; 1561,803.98 1574.85,790.12 ; 1561,803.98 1588.83,803.98 ; 1574.85,790 1588.83,803.98 ; 1574.85,790 1574.85,790.12 ; 1940,1180 1950,1180 ; 1940,1180 1940,1190 ; 1940,1190 1950,1180
  Top Layer w20: v3(3693.11,2056.02) 3693.11,2036.89 3745,1985 3840,1985 3865,1960 P5.7
  Bottom Layer w20: U1.2 U1.4 ; C16.2@2317.87,834.86 U1.4 ; R31.2 2757.23,342.23 2805,390 3215,390 JTAG1.1 ; v2(3180,1642.24) 2522.24,1642.24 2317.87,1437.87 U1.4 ; JTAG1.1@3282.78,322.22 C23.1 ; v2(3865,1645) P5.7
  other v1: 1687.24,319.98 2322.74,830 1321.59,1053.41 1461.59,1193.41 3265,2082.24 3365,2082.24
  other v2: 2130,705 2290,935 3867.24,1735 3865,1815
  other v4: 2615,330
LDCADDR: P4.5 P5.3 R22.1 | length 243.3
  Top Layer w10: P5.3 3535.63,1980.63 P4.5
  Bottom Layer w10: P5.3 R22.1
LDCSD: P4.4 P5.4 R23.1 | length 204
  Top Layer w10: P5.4@3575,1920 P4.4
  Bottom Layer w10: P5.4 R23.1
MISO: P7.7 SD*1.3 U2.4 | length 1177.9
  Top Layer w8: SD*1.3 v1(1192.82,1901.71) 1192.82,1887.18 1240,1840 1320,1840 1465.02,1694.98 1583.68,1694.98 U2.4
  Bottom Layer w8: P7.7 1041.11,1750 v1(1192.82,1901.71)
MOSI: P7.6 SD*1.7 U2.2 | length 1203.3
  Top Layer w8: SD*1.7 v1(1366.05,1900) 1366.05,1849.42 1490.8,1724.67 1609.67,1724.67 U2.2
  Bottom Layer w8: P7.6 1173.53,1703.53 1248.53,1703.53 1259.53,1714.53 1259.53,1793.48 v1(1366.05,1900)
Net358LM_1: 358LM.1 358LM.2 R16.2 | length 293.8
  Bottom Layer w10: 358LM.2 R16.2 1207.99,925 358LM.1
Net358LM_3: 358LM.3 C2.2 D4.2 R15.1 R19.2 | length 472.7
  Top Layer w10: R15.1 R19.2
  Bottom Layer w10: v1(1025,665) 1025,790 1060,825 358LM.3 1237.76,825 C2.2
NetC4_1: C4.1 C6.2 F1.2 VCC*1.3 | length 261.1
  Bottom Layer w40: 204.98,1222.24 204.98,1195 ; F1.2 247.97,1152.01 ; 204.98,1195 204.98,1152.01 247.97,1152.01 ; 204.98,1195 247.97,1152.01
  other v1: 160,1245 182.24,1244.98 205,1245
NetC9_1: C9.1 C11.2 F2.2 VCC*2.3 | length 251
  Bottom Layer w40: C11.2@199.02,1828.21 199.02,1790 ; F2.2 237.03,1751.99 ; 199.02,1790 199.02,1751.99 237.03,1751.99 ; 199.02,1790 237.03,1751.99
  other v1: 160,1845 182.24,1844.98 205,1845
NetC21_2: C21.2 L1.2 U2.31 U2.32 | length 262.5
  Top Layer w10: U2.32 1460,1039.18 v1(1460,1055) 1472.01,1055 U2.31
  Bottom Layer w15: C21.2 L1.2
NetC22_2: C22.2 U2.37 | length 512.5
  Top Layer w10: U2.37 1537.82,920 1807.76,920 v1(1892.76,835)
NetC25_2: C25.2 C26.2 L2.2 Y1.4 | length 320
  Bottom Layer w20: Y1.4@2222.24,385 L2.2
NetC27_2: C27.2 R32.1 U2.40 Y2.1 | length 296.1
  Top Layer w10: U2.40 1526.59,825.26 v1(1526.59,878.39)
  Bottom Layer w10: C27.2 1526.59,886.59 v1(1526.59,878.39) Y2.1@1609.1,960.9
NetC28_2: C28.2 R32.2 U2.41 Y2.2 | length 333.4
  Top Layer w10: U2.41 1554.18,825 v1(1585,825) v1@1585,819.98
  Bottom Layer w10: v1(1585,825) 1585,819.98 R32.2 ; R32.2@1603,811.57 R32.2 ; C28.2@1653.39,751.59 R32.2 ; Y2.2 1671.12,889.29 R32.2
NetD2_1: D2.1 R24.1 | length 55.5
  Top Layer w10: D2.1 R24.1
NetD3_1: D3.1 R25.1 | length 80.5
  Top Layer w10: D3.1 R25.1
NetF3_2: F3.2 IN1.2 | length 110
  Bottom Layer w30: IN1.2 F3.2
NetIC1_2: IC1.2 P10.2 | length 173.7
  Top Layer w15: IC1.2 3480.59,384.41 3550.02,314.98 P10.2
NetIC1_3: IC1.3 P10.1 | length 242.6
  Top Layer w15: IC1.3 3506.18,393.82 3525,375 3609.98,375 P10.1
NetIC1_4: IC1.4 IC1.5 IC1.6 IC1.7 IC1.8 IC1.9 IC1.11 IC1.12 IC1.13 IC1.14 IC1.15 IC1.16 P10.3 R21.2 | length 1506.4
  Top Layer w10: IC1.4 3531.77,476.77 3540,485 3608.54,485 ; v3(3557.36,439.98) 3557.36,482.36 ; IC1.16 3557.36,652.64 3565,645 3608.54,645 ; IC1.6 3582.95,482.05 ; 3582.95,647.95 IC1.15 ; IC1.7 3608.54,485 ; IC1.14 3608.54,645 ; IC1.8 3634.13,485 ; IC1.13 3634.13,645 ; IC1.9 3659.72,485 ; IC1.12 3659.72,645 ; IC1.11 3685.32,660.32 3670,645 3659.72,645 ; 3608.54,485 3608.54,645 ; 3608.54,485 3634.13,485 ; 3608.54,645 3634.13,645 ; 3634.13,485 3634.13,645 ; 3634.13,485 3659.72,485 ; 3634.13,645 3659.72,645 ; 3659.72,485 3659.72,645
  Bottom Layer w10: R21.2 P10.3@3462.99,307.97 ; P10.3 3557.36,402.34 v3(3557.36,439.98)
NetLS1_2: LS1.2A Q1.3 | length 100
  Bottom Layer w10: Q1.3@3350,1605 LS1.2A
NetP4_3: P4.3 P5.5 | length 167
  Top Layer w10: P4.3 3614.37,1960.63 P5.5
NetQ1_2: Q1.1 R12.1 | length 99.6
  Bottom Layer w10: R12.1@3260.71,1467.95 Q1.1
NetR3_2: R3.2 sw1.4 | length 112.8
  Bottom Layer w20: R3.2 v1(3445,935)
NetR20_2: R20.2 sw2.5 sw2.6 sw2.7 sw2.8 | length 426.6
  Bottom Layer w30: R20.2 3230,475 ; sw2.8 sw2.7 sw2.6 3255,500 ; 3230,475 3255,500 ; 3230,475 3250,455 sw2.5 3255,500
NetR40_1: R40.1 S5.3 | length 87.8
  Top Layer w10: S5.3 R40.1@1215,522.74
NetR42_1: R42.1 s6.3 | length 92.7
  Top Layer w10: R42.1@1215,242.24 s6.3
OLEDCLK: OLED1.5 U2.45 | length 1198.7
  Top Layer w6: OLED1.5 960,1470 960,1220 1490.02,689.98 1530.51,689.98 U2.45
OLEDCS: OLED1.1 U2.49 | length 964.7
  Top Layer w6: OLED1.1 962.12,1150 1477.14,634.98 1586.87,634.98 U2.49
OLEDDC: OLED1.2 U2.48 | length 987.8
  Top Layer w6: OLED1.2 880,1249.09 1481.11,647.98 1572.03,647.98 U2.48
OLEDMISO: OLED1.4 U2.46 | length 1129.2
  Top Layer w6: OLED1.4 948,1382 948,1215.03 1488.05,674.98 1543.35,674.98 U2.46
OLEDRST: OLED1.3 U2.47 | length 1059.7
  Top Layer w6: OLED1.3 936,1294 936,1210.06 1486.08,659.98 1556.19,659.98 U2.47
PCS0: P7.4 SD*1.2 U2.7 | length 1108.8
  Top Layer w8: SD*1.2 1149.51,1895.49 1270,1775 v1(1270,1650) 1270,1600 1305,1565 1630.15,1565 1820.17,1374.98 U2.7
  Bottom Layer w8: P7.4 v1(1270,1650)
"PGA0 DM": U2.28
"PGA0 PM": U2.27
"PGA1 DM": U2.30
"PGA1 PM": U2.29
"PGA2 DM": U2.24
"PGA2 DP": U2.23
"PGA3 DM": U2.26
"PGA3 PM": U2.25
PTA5: U2.55
PTA6: U2.58
PTA7: U2.59
PTA8: D5.2 R40.2 U2.60 | length 570
  Top Layer w10: R40.2 1432.22,400 v1(1640,400) ; v1(1705,465) 1723.11,465 U2.60
  Bottom Layer w10: v1(1640,400) v1(1705,465)
  other v1: 1320,530
PTA9: D6.2 R42.2 U2.61 | length 605.1
  Top Layer w10: R42.2 1302.24,247.24 1425,370 v1(1665,370) ; v1(1730,435) 1730,444.05 U2.61
  Bottom Layer w10: v1(1665,370) v1(1730,435)
  other v1: 1320,230
PTA10: U2.62
PTA11: U2.63
PTA12: U2.64
PTA13: U2.65
PTA16: U2.68
PTA17: U2.69
PTA18: U2.72 Y1.3 | length 166.7
  Top Layer w10: U2.72@1920,327.82 1977.82,327.82 1985,335 v4(1985,345) 1965,365 1957.18,365 U2.72 U2.72@1920,327.82
PTA19: U2.73
PTA24: U2.75
PTA25: U2.76
PTA26: U2.77
PTA27: U2.78
PTA28: U2.79
PTA29: U2.80
PTB0: P11.7 U2.81 | length 673.7
  Top Layer w6: U2.81 2258.06,352.47 2687.47,352.47 P11.7
PTB1: P11.5 U2.82 | length 553.9
  Top Layer w6: U2.82 2271.9,366.47 2601.47,366.47 P11.5
PTB2: P11.3 U2.83 | length 440
  Top Layer w6: U2.83 2285.74,380.47 2525.47,380.47 P11.3@2555,410
  Top Layer w8: P11.3@2555,410 P11.3
PTB3: P11.1 U2.84 | length 293.3
  Top Layer w6: U2.84 2274.05,420 P11.1
PTB4: P11.8 U2.85 | length 593.4
  Top Layer w6: 2261.89,460 2695,460 P11.8
  Top Layer w7: U2.85 2261.89,460
PTB5: P11.6 U2.86 | length 472.8
  Top Layer w6: U2.86 2274.73,475 2610,475 P11.6
PTB6: P11.4 U2.87 | length 354.7
  Top Layer w6: U2.87 2290.56,487 2522,487 P11.4
PTB7: P11.2 U2.88 | length 219.2
  Top Layer w6: U2.88 2285.4,520 P11.2
PTB8: U2.89
PTB9: sw2.4 U2.90 | length 729.9
  Top Layer w6: U2.90 2305.08,556 2854,556 sw2.4
PTB10: sw2.3 U2.91 | length 680.3
  Top Layer w6: U2.91 2320.92,568 2877,568 2890,555 sw2.3
PTB11: sw2.2 U2.92 | length 692.8
  Top Layer w6: U2.92 2336.76,580 2880,580 sw2.2
PTB16: sw2.1 U2.95 | length 697.4
  Top Layer w6: U2.95 2405.27,595 2795,595 sw2.1
PTB17: sw1.5 U2.96 | length 1313.2
  Top Layer w8: U2.96 2405.11,623 2723,623 v1(2860,760) ; v1(2860,835) 2865,840 3095,840 3280.31,1025.31 sw1.5
  Bottom Layer w8: v1(2860,760) v1(2860,835)
PTB18: P3.4 R8.1 U2.97 | length 1789.3
  Top Layer w10: U2.97 2416.95,639 2709,639 v1(2830,760) ; v1(2830,835) 2830,854 2837,861 3093.37,861 3307.37,1075 3550,1075 3615,1010 v1(3615,957.23) 3667.23,905 3730.02,905 P3.4
  Bottom Layer w10: v1(2830,760) 2830,840 v1(2830,835)
PTB19: P3.3 R7.2 U2.98 | length 1847.4
  Top Layer w10: U2.98 2428.79,655 2695,655 v1(2800,760) ; v1(2800,835) 2800,860 2820,880 3082.63,880 3297.63,1095 3562.23,1095 v1(3700,957.23) v1@3700,957.63
  Bottom Layer w10: v1(2800,760) v1(2800,835) ; v1(3700,957.23) 3752.23,905 3830.02,905 P3.3
PTB20: sw1.6 U2.99 | length 1326.2
  Top Layer w8: U2.99 2440.63,671 2681,671 v1(2770,760) ; v1(2770,835) 2770,875 2791,896 3076,896 3335.24,1155.24 sw1.6
  Bottom Layer w8: v1(2770,760) v1(2770,835)
PTB21: sw1.3 U2.100 | length 749.8
  Top Layer w8: U2.100 2452.47,687 2667,687 v1(2740,760) ; v1(2740,835) 2740,890 2784.76,934.76 sw1.3
  Bottom Layer w8: v1(2740,760) v1(2740,835)
PTB22: sw1.2 U2.101 | length 770.2
  Top Layer w8: U2.101 2464.31,703 2653,703 v1(2710,760) ; v1(2710,835) 2710,897.37 2837.94,1025.31 sw1.2
  Bottom Layer w8: v1(2710,760) v1(2710,835)
PTB23: sw1.1 U2.102 | length 798.3
  Top Layer w8: U2.102 2476.15,719 2639,719 v1(2680,760) ; v1(2680,835) 2680,890 sw1.1@2945.24,1155.24
  Top Layer w10: sw1.1@2945.24,1155.24 sw1.1
  Bottom Layer w8: v1(2680,760) v1(2680,835)
PTC0: U2.103
PTC1: IC1.18 R17.1 U2.104 | length 1242.3
  Top Layer w10: U2.104 2510.82,740 2625,740 2679,794 3466,794 3506.18,753.82 IC1.18 3506.18,643.43 v1(3475,612.24)
PTC2: IC1.17 R18.1 U2.105 | length 1261
  Top Layer w10: U2.105 2522.66,756 2618.37,756 2672.37,810 3472.63,810 3531.77,750.86 IC1.17 3531.77,650.47 v1(3570,612.24)
PTC3: U2.106
PTC4: U2.109
PTC5: P2.4 R2.2 U2.110 | length 1452.3
  Top Layer w10: U2.110 2834.34,1270 3595,1270 v1(3700,1375) 3715,1390 P2.4
PTC6: D3.2 U2.111 | length 848.3
  Top Layer w8: U2.111 2909.26,1372.76 D3.2
PTC7: R12.2 U2.112 | length 961.9
  Top Layer w10: U2.112 2912.1,1403.44 3229.31,1403.44 v4(3260,1372.76)
PTC8: U2.113
PTC9: U2.114
PTC11: P4.6 P5.2 R13.1 U2.116 | length 1647.1
  Top Layer w10: U2.116 3213.65,1816.35 3213.65,1943.65 3235,1965 v1(3365,1965) 3455,1965 3496.26,2006.26 P4.6
  Bottom Layer w10: P5.2 v1(3365,1965)
PTC12: U2.117
PTC13: U2.118
PTC14: U2.119
PTC15: P6.1 U2.120 | length 1237
  Top Layer w10: U2.120 3090,1804.05 3090,1960 P6.1
PTC16: P6.4 U2.123 | length 1071.1
  Top Layer w10: U2.123 3040,1837.56 P6.4
PTC17: P6.3 U2.124 | length 1163
  Top Layer w10: U2.124 2990,1815.4 2990,1960 P6.3
PTC18: P6.6 U2.125 | length 1013.4
  Top Layer w10: U2.125 2940,1793.24 P6.6
PTC19: U2.126
PTD0: P8.1 U2.127 | length 1097.6
  Top Layer w6: U2.127 U2.127@2279.02,1187.05
  Top Layer w10: U2.127@2279.02,1187.05 2890,1798.03 2890,1960 P8.1
PTD1: P8.2 U2.128 | length 947.5
  Top Layer w10: U2.128 2840,1776.76 P8.2
PTD2: P8.3 U2.129 | length 1043.5
  Top Layer w10: U2.129 2795,1759.6 2795,1955 P8.3
PTD3: P8.4 U2.130 | length 889.8
  Top Layer w10: U2.130 2740,1732.44 P8.4
PTD4: P8.5 U2.131 | length 985.8
  Top Layer w10: U2.131 2695,1715.27 2695,1955 P8.5
PTD5: P8.6 U2.132 | length 832.1
  Top Layer w10: U2.132 2640,1688.11 P8.6
PTD6: P8.7 U2.133 | length 928.1
  Top Layer w10: U2.133 2595,1670.95 2595,1955 P8.7
PTD7: P8.8 U2.136 | length 758
  Top Layer w10: U2.136 2540,1699.47 P8.8
PTD8: P8.9 U2.137 | length 849.9
  Top Layer w10: U2.137 2490,1677.31 2490,1960 P8.9
PTD9: P8.10 U2.138 | length 700.3
  Top Layer w10: U2.138 2440,1655.15 P8.10
PTD10: U2.139
PTD11: U2.140
PTD12: U2.141
PTD13: U2.142
PTD14: U2.143
PTD15: U2.144
PTE2: P7.5 SD*1.5 U2.3 | length 1092.2
  Top Layer w8: SD*1.5 v1(1279.43,1900) 1279.43,1875.57 1300,1855 1330,1855 1474.33,1710.67 1595.83,1710.67 U2.3
  Bottom Layer w8: P7.5 1129.43,1750 v1(1279.43,1900)
PTE6: U2.9
PTE7: U2.10
PTE8: BT2.1 U2.11 | length 778
  Top Layer w10: BT2.1 1146.02,1326 1757.79,1326 U2.11
PTE9: BT2.2 U2.12 | length 656.6
  Top Layer w10: BT2.2 1230.02,1310 1745.95,1310 U2.12
PTE10: U2.13
PTE11: U2.14
PTE12: U2.15
RESET: C24.2 JTAG1.10 R31.1 S3.2 U2.74 | length 912.7
  Top Layer w10: U2.74 2105.66,310 v1(2295,310)
  Bottom Layer w10: v1(2295,310) 2357.26,247.74 C24.2 R31.1 2662.74,247.74 v1(2710,295) 2810,295 JTAG1.10
TCK: JTAG1.4 U2.50 | length 1924.6
  Top Layer w8: U2.50 1598,618.27 1598,477 1912,163 3108,163 JTAG1.4
TDI: JTAG1.8 U2.51 | length 1681.6
  Top Layer w8: U2.51 1612,604.44 1612,482.8 1917.8,177 2922,177 JTAG1.8
TDO: JTAG1.6 U2.52 | length 1775.1
  Top Layer w8: U2.52 1626,590.6 1626,488.6 1923.6,191 2766,191 2849,274 3031,274 JTAG1.6
TMS: JTAG1.2 U2.53 | length 1945.4
  Top Layer w8: U2.53 1640,576.76 1640,494.4 1929.4,205 2760.2,205 2844.2,289 3191.98,289 3192.98,290 3215,290 JTAG1.2
USB0_DM: U2.20
USB0_DP: U2.19
VBAT: pad.0@450,330 S1.2
VCC: 1NS1.A C3.1 F1.1 F2.1 P1.1 R15.2 S1.0 S1.1
  other v1: 862.99,665
  other v2: 645,515 415,840 335,1025 320,1625
VCCA: C17.2 F3.1 U1.3 | length 236
  Bottom Layer w30: F3.1 1931.99,1386.99 1965.53,1420.53 U1.3
VREGIN: U2.22
VST: 1NS1.K S5.2 s6.2 | length 407.4
  Top Layer w40: 1NS1.K 1085,515 1115,485 S5.2 s6.2
pads on no net: 358LM.5 358LM.6 358LM.7 P2.3 P2.5 P2.6 P3.5 P3.6 P4.8 P4.9 SD*1.10 SD*1.11 SD*1.12 SD*1.13 Y1.1
copper on no net:
  other v5: 1074.71,2329.62 1389.67,2329.62

## Polygon pours and split planes (outlines as drawn)
EGND on GND (split plane): 769.57,1014.68 774.05,1013.78 778.38,1012.31 782.49,1010.29 786.29,1007.75 789.73,1004.73 792.75,1001.29 795.29,997.49 797.31,993.38 798.78,989.05 799.68,984.57 799.96,980.29 799.93,980 799.93,165.1 20.1,165.09 20.1,1014.93 765,1014.93 765.29,1014.96
GND on GND (split plane): 3916.91,2188.39 3916.91,165.11 830.07,165.1 830.07,980 830.08,980 829.76,986.38 828.83,992.7 827.28,998.89 825.12,1004.9 822.39,1010.68 819.11,1016.16 815.31,1021.29 811.02,1026.02 806.29,1030.31 801.16,1034.11 795.68,1037.39 789.9,1040.12 783.89,1042.28 777.7,1043.83 771.38,1044.77 765,1045.08 765,1045.07 20.1,1045.07 20.1,2246.68 128.32,2354.9 3849.07,2354.9
K3.3V on POWER (split plane): 3916.91,2188.39 3916.91,1595.07 3150.07,1595.07 3150.07,1668.76 3250.66,1769.34 3252.53,1771.63 3253.93,1774.23 3254.78,1777.06 3255.07,1780 3255.07,2354.9 3849.07,2354.9
K3.3V on POWER (split plane): 2624.93,1083.76 2624.93,695 2624.93,295.07 1671.24,295.07 1300.07,666.24 1300.07,1083.76 1445.66,1229.34 1516.24,1299.93 1735,1299.93 1737.94,1300.22 1740.77,1301.07 1743.37,1302.47 1745.66,1304.34 1886.24,1444.93 2263.76,1444.93
5V on POWER (split plane): 3916.91,165.11 935.07,165.1 935.07,735 934.78,737.94 933.93,740.77 932.53,743.37 930.66,745.66 928.37,747.53 925.77,748.93 922.94,749.78 920,750.07 681.24,750.07 415.07,1016.24 415.07,1539.93 863.76,1539.93 954.34,1449.34 956.63,1447.47 959.23,1446.07 962.06,1445.22 965,1444.93 1843.61,1444.93 1728.76,1330.07 1510,1330.07 1507.06,1329.78 1504.23,1328.93 1501.63,1327.53 1499.34,1325.66 1424.34,1250.66 1274.34,1100.66 1272.47,1098.37 1271.07,1095.77 1270.22,1092.94 1269.93,1090 1269.93,660 1270.22,657.06 1271.07,654.23 1272.47,651.63 1274.34,649.34 1654.34,269.34 1656.63,267.47 1659.23,266.07 1662.06,265.22 1665,264.93 3540,264.93 3542.94,265.22 3545.77,266.07 3548.37,267.47 3550.66,269.34 3552.53,271.63 3553.93,274.23 3554.78,277.06 3555.07,280 3555.07,1564.93 3916.91,1564.93
3.3V on POWER (split plane): 3224.93,1786.24 3124.34,1685.66 3122.47,1683.37 3121.07,1680.77 3120.22,1677.94 3119.93,1675 3119.93,1580 3120.22,1577.06 3121.07,1574.23 3122.47,1571.63 3124.34,1569.34 3126.63,1567.47 3129.23,1566.07 3132.06,1565.22 3135,1564.93 3524.93,1564.93 3524.93,295.07 2655.07,295.07 2655.07,695 2655.07,1090 2654.78,1092.94 2653.93,1095.77 2652.53,1098.37 2650.66,1100.66 2280.66,1470.66 2278.37,1472.53 2275.77,1473.93 2272.94,1474.78 2270,1475.07 971.24,1475.07 880.66,1565.66 878.37,1567.53 875.77,1568.93 872.94,1569.78 870,1570.07 415.07,1570.07 415.07,1680 414.78,1682.94 413.93,1685.77 412.53,1688.37 410.66,1690.66 408.37,1692.53 405.77,1693.93 402.94,1694.78 400,1695.07 20.1,1695.07 20.1,2246.68 128.32,2354.9 3224.93,2354.9
VCC on POWER (split plane): 384.93,1010 385.22,1007.06 386.07,1004.23 387.47,1001.63 389.34,999.34 664.34,724.34 666.63,722.47 669.23,721.07 672.06,720.22 675,719.93 904.93,719.93 904.93,165.1 595.07,165.09 595.07,495 594.78,497.94 593.93,500.77 592.53,503.37 590.66,505.66 385.66,710.66 383.37,712.53 380.77,713.93 377.94,714.78 375,715.07 20.1,715.07 20.1,1664.93 384.93,1664.93
VBAT on POWER (split plane): 564.93,488.76 564.93,165.09 20.1,165.09 20.1,684.93 368.76,684.93

## Keep-outs
Keep-Out Layer:
  lines w10: 3936.07,2194.62 3862.58,2375 192.64,2375 120,2375 0,2255 0,144.99 3937.01,145.01 3937.01,2195

## Other copper
Top Layer:
  rectangle net PTA18: 1952.18,350 1970,360
  rectangle net PTA18: 1947.18,345 1980,355
  rectangle net PTA18: 1940,340 1985,347.82
  rectangle net PTA18: 1932.18,332.5 1985,340
  text "武汉理工大学" at 150,2290 h50
  text "2016" at 490,2290 h50
  text "晨风" at 630,2290 h39.37
  text "张艳松" at 155,2230 h50
  text "袁佳威" at 310,2230 h50
  text "李锐戈" at 475,2230 h50
  text "武汉理工大学" at 1944.8,2060.75 h50
  text "晨风" at 2093.53,2022.8 h39.37
  text "2016" at 1945.79,2019.41 h50 r0.25
  text "张艳松" at 1945.79,1979.06 h50
  text "袁佳威" at 1943.82,1935.75 h50
  text "李锐戈" at 1944.8,1886.54 h50
GND (plane layer: these items are gaps in the copper):
  lines w30: 0,1030 765,1030 cw(c765,980) 815,980 815,145
POWER (plane layer: these items are gaps in the copper):
  lines w30: -5,1680 400,1680 400,1010 675,735 920,735 920,145 915,145 ; 0,700 295,700 375,700 580,495 580,145 ; 400,1555 870,1555 965,1460 1880,1460 ; 3240,2375 3240,1780 3135,1675 3135,1580 3540,1580 ; 3937.01,1580 3540,1580 ; 1880,1460 1735,1315 1510,1315 1435,1240 1285,1090 1285,660 1665,280 2640,280 ; 1880,1460 2270,1460 2640,1090 2640,695 2640,280 ; 2640,280 3540,280 3540,1580

## Silkscreen, mask and mechanical layers (free items; w line width, h text height)
Top Overlay:
  lines w5: 3930,920 3920,920 3920,990 3930,990 ; 3935,1340 3925,1340 3925,1410 3935,1410
  text "5V" at 2450,2320.06 h39.37
  text "GND" at 2762.48,2320.02 h39.37
  text "3.3V" at 3075,2320.02 h39.37
  text "SCL" at 3235,1965 h50
  text "SDA" at 3330,1965 h50
  text "ADDR" at 3415,1965 h50
  text "SD" at 3540,1965 h50
  text "INTB" at 3620,1965 h50
  text "GND" at 3730,1965 h50
  text "3.3v" at 3815,1965 h50
  text "C10" at 3235,1820 h50
  text "C11" at 3330,1820 h50
  text "GND" at 935,1775 h39.37 r270
  text "C7" at 3415,1705 h30
  text "3.3V" at 935,1685 h39.37 r270
  text "1K" at 3220,1615 h39.37 r270
  text "LED_W" at 3225,1475 h39.37 r270
  text "武汉理工大学" at 1050,1460 h50
  text "2016" at 1390,1460 h50
  text "晨风" at 1530,1460 h39.37
  text "C5" at 3760,1425 h50
  text ">" at 3105,1420 h50 r270
  text "张艳松" at 1055,1400 h50
  text "袁佳威" at 1210,1400 h50
  text "李锐戈" at 1375,1400 h50
  text "E8" at 1055,1310 h39.37
  text "E9" at 1155,1310 h39.37
  text "GND" at 1245,1310 h39.37
  text "5V" at 1355,1310 h39.37
  text "C6" at 3155,1310 h30
  text "5V" at 3765,1210 h39.37
  text "GND" at 3855,1205 h39.37
  text "B23" at 2945,1190 h30
  text "B20" at 3425,1185 h30
  text "B22" at 2945,1060 h30
  text "B17" at 3425,1060 h30
  text "B18" at 3745,985 h50
  text "B19" at 3845,985 h50
  text "B21" at 2945,965 h30
  text "5V" at 3755,765 h39.37
  text "B16" at 2885,745 h30
  text "5.1K" at 1085,715 h30
  text "10K" at 905,710 h30
  text "GND" at 3850,700 h39.37
  text "B11" at 2880,640 h30
  text "220R" at 1220,580 h39.37
  text "B10" at 2880,540 h30
  text "A8" at 1335,520 h39.37
  text "5V" at 3785,515 h39.37 r90
  text "D" at 750,500 h39.37
  text "GND" at 985,500 h39.37
  text "7.5V" at 1080,500 h39.37
  text "VCC" at 435,485 h39.37
  text "GND" at 120,475 h39.37
  text "B9" at 2885,440 h30
  text "FTM1" at 1265,415 h39.37 r270
  text "GND" at 3785,415 h39.37 r90
  text "LED_B" at 1445,360 h39.37
  text "2K" at 1585,355 h50
  text "VCC" at 590,335 h39.37 r90
  text "0R" at 945,335 h39.37 r90
  text ">" at 1495,335 h50 r180
  text ">" at 1645,335 h50 r180
  text "220R" at 1285,280 h39.37
  text "GND" at 590,230 h39.37 r90
  text "0R" at 945,230 h39.37 r90
  text "A9" at 1335,215 h39.37
  text "GND" at 3435,180 h39.37
Bottom Overlay:
  text "10K" at 3285,2115 h30
  text "10K" at 3380,2115 h30
  text "C" at 770,2055 h39.37
  text "0R" at 3480,2025 h30
  text "0R" at 3580,2025 h30
  text "C" at 145,1835 h39.37
  text "C" at 770,1830 h39.37
  text "C" at 3725,1800 h30
  text "C" at 145,1740 h39.37
  text "C" at 3725,1725 h30
  text "<" at 3800,1660 h50 r180
  text "F" at 325,1645 h39.37
  text "D" at 3655,1630 h30
  text "C" at 770,1445 h39.37
  text "1.5K" at 3230,1445 h39.37 r90
  text "4.7K" at 3740,1410 h39.37
  text "F" at 1840,1335 h39.37 r90
  text "D" at 1730,1330 h39.37 r90
  text "C" at 1945,1330 h39.37 r90
  text "10uH" at 1410,1270 h39.37 r90
  text "C" at 145,1230 h39.37
  text "104" at 3855,1225 h39.37
  text "C" at 775,1205 h39.37
  text "104" at 2050,1200 h39.37
  text "104" at 1345,1190 h39.37 r90
  text "C" at 145,1150 h39.37
  text "103" at 1280,1120 h39.37 r90
  text "C" at 2375,1110 h39.37
  text "F" at 345,1080 h39.37
  text "0R" at 670,1055 h39.37
  text "C" at 2375,1025 h39.37
  text "4.7K" at 3650,990 h39.37
  text "4.7K" at 3740,990 h39.37
  text ">" at 2375,950 h50 r180
  text "D3.3" at 2500,900 h39.37 r270
  text "0R" at 1330,865 h30
  text "10K" at 3305,845 h39.37
  text "C" at 2360,820 h39.37 r270
  text "104" at 3855,785 h39.37
  text "C" at 1330,725 h30
  text ">" at 1115,680 h50 r180
  text "10K" at 1860,670 h39.37 r90
  text "10uH" at 2265,670 h39.37 r270
  text "10K" at 3640,595 h39.37 r90
  text "104" at 3340,590 h39.37 r90
  text "D3V3" at 1295,575 h39.37
  text "104" at 2265,575 h39.37 r270
  text "10K" at 3130,525 h39.37
  text ">" at 1250,510 h50
  text "103" at 2265,475 h39.37 r270
  text "0R" at 945,370 h39.37 r90
  text "104" at 3420,310 h39.37 r90
  text "D3V3" at 1305,275 h39.37
  text "0R" at 945,265 h39.37 r90
  text ">" at 1260,215 h50
  text "0R" at 3545,185 h39.37
  text "104" at 2570,180 h39.37
  text "10K" at 2660,180 h39.37
Mechanical 15:
  lines w39.37: 1576.3,1615.18 1576.3,2717.54 ; 1576.3,1715.18 2363.7,1715.18 ; 1576.3,3189.98 1576.3,2717.54 ; 2363.7,1615.18 2363.7,2717.54 ; 2363.7,3189.98 2363.7,2717.54 ; 3564.49,3189.98 375.51,3189.98 296.77,2914.39 ; -510.32,827.78 4450.31,827.78 ; -510.32,827.78 -470.94,1221.48 ; -510.32,827.78 -510.32,5 4450.31,5 4450.31,827.78 ; -470.94,1221.48 4410.94,1221.48 ; -470.94,1221.48 -352.83,1615.18 ; -352.83,1615.18 4292.83,1615.18 ; -352.83,1615.18 -116.61,2008.88 ; -116.61,2008.88 4056.61,2008.88 ; -116.61,2008.88 99.92,2402.58 ; 99.92,2402.58 3840.08,2402.58 ; 99.92,2402.58 296.77,2914.39 ; 296.77,2914.39 3643.23,2914.39 3840.08,2402.58 ; 1576.3,2717.54 2363.7,2717.54 ; 3840.08,2402.58 4056.61,2008.88 ; 4056.61,2008.88 4292.83,1615.18 ; 4292.83,1615.18 4410.94,1221.48 ; 4410.94,1221.48 4450.31,827.78

## Text inside footprints (layer, text, board x,y; h text height)
C3: Top Overlay "+" at 440.21,729.07 h78.74
P2: Top Overlay "1" at 3905,1210 h50 r90
P3: Top Overlay "1" at 3900,774.98 h50 r90